# EAGLE board schematic (EAGLE 9.4.2)
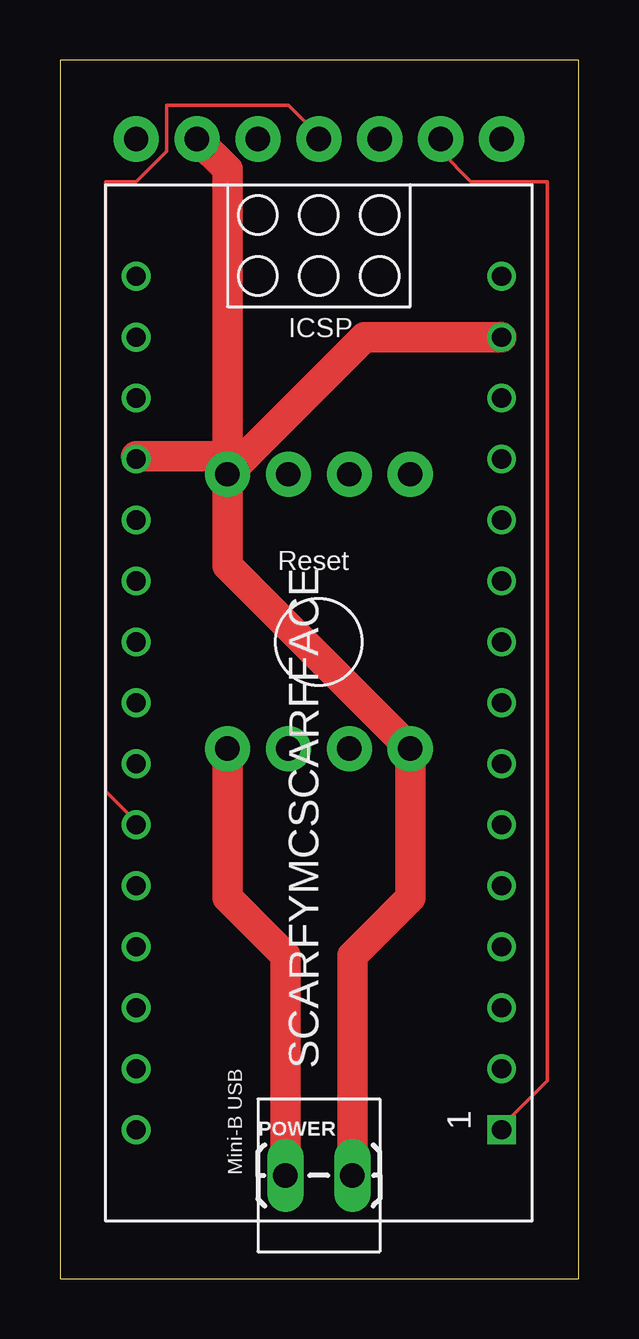
[diagram p0: board, top side]
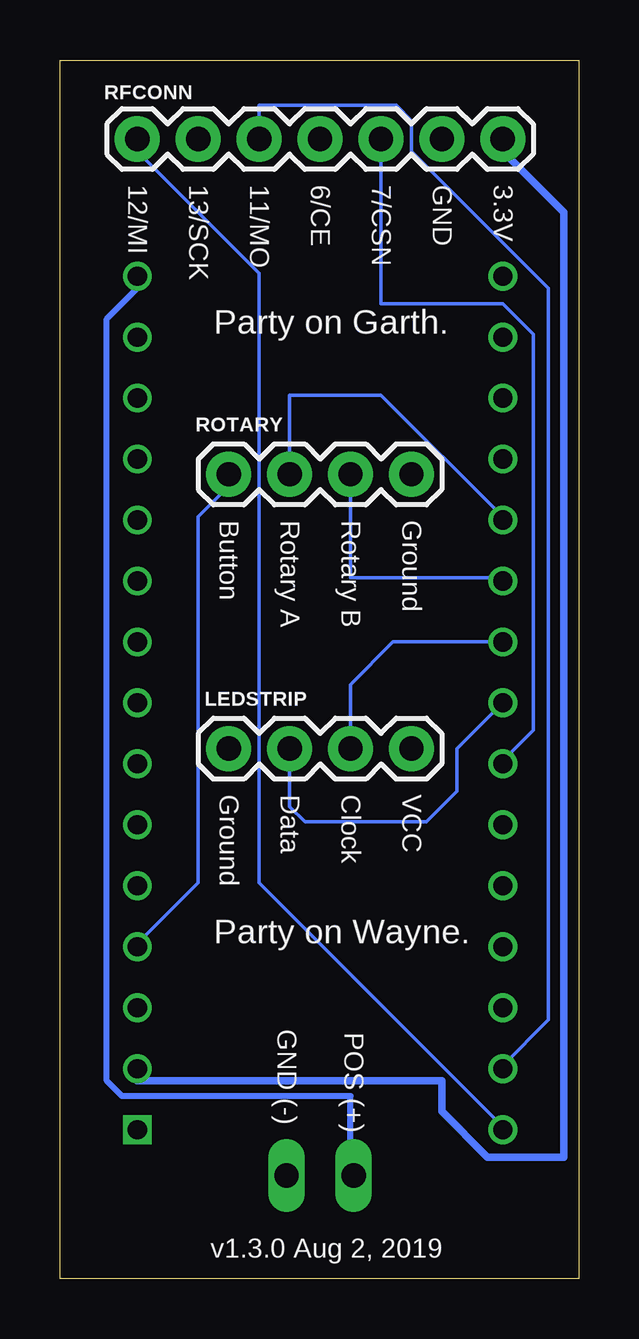
[diagram p1: board, bottom side, seen from below]

Size 21.64 x 50.79 mm. Coordinates in mm from the lower left corner, seen from the top.
Outline: 0,0 21.64,0 21.64,50.79 0,50.79 0,0
Copper layers (1*16): Top 0.035559375mm / dielectric 1.6mm / Bottom 0.035559375mm
Design rules "oshpark-2layer": minimum track width 6mil, minimum drill 10mil, track to track 6mil, track to pad 6mil, pad to pad 6mil, via to via 6mil, smd to smd 6mil, copper to edge 15mil, drill to drill 6mil, minimum pad ring 5mil, minimum via ring 5mil, stop-mask expansion 2.5mil, vias tented up to drill 0mil, thermal gap 10mil

## Footprints (pad centres in the part's own frame; a part is rotated, then mirrored left to right if it is on the bottom)
1X04 = drill 1.016 pad 1.88: 1 0,0; 2 2.54,0; 3 5.08,0; 4 7.62,0
1X02_LOCK_LONGPADS = drill 1.016 long: 1 -0.127,0; 2 2.667,0
1X07 = drill 1.016 pad 1.88: 1 0,0; 2 2.54,0; 3 5.08,0; 4 7.62,0; 5 10.16,0; 6 12.7,0; 7 15.24,0
ARDUINO_NANO = drill 0.8 square: 1 -20.32,-7.62 | drill 0.8: 2 -17.78,-7.62; 3 -15.24,-7.62; 4 -12.7,-7.62; 5 -10.16,-7.62; 6 -7.62,-7.62; 7 -5.08,-7.62; 8 -2.54,-7.62; 9 0,-7.62; 10 2.54,-7.62; 11 5.08,-7.62; 12 7.62,-7.62; 13 10.16,-7.62; 14 12.7,-7.62; 15 15.24,-7.62; 16 15.24,7.62; 17 12.7,7.62; 18 10.16,7.62; 19 7.62,7.62; 20 5.08,7.62; 21 2.54,7.62; 22 0,7.62; 23 -2.54,7.62; 24 -5.08,7.62; 25 -7.62,7.62; 26 -10.16,7.62; 27 -12.7,7.62; 28 -15.24,7.62; 29 -17.78,7.62; 30 -20.32,7.62

## Placement (x,y rotation side)
LEDSTRIP  [1X04]  14.61,22.1 0 bottom
POWER  [1X02_LOCK_LONGPADS]  9.53,4.32 0 top
RFCONN  [1X07]  18.41,47.5 0 bottom
ROTARY  [1X04]  14.61,33.53 0 bottom
SCARFYMCSCARFFACE  [ARDUINO_NANO]  10.79,26.54 90 top

## Library data of the parts
LEDSTRIP ROTARY = SparkFun-Connectors; PROD_ID: CONN-09696
POWER RFCONN = SparkFun-Connectors
SCARFYMCSCARFFACE = ArduinoNanoV30

## Nets
5V: SCARFYMCSCARFFACE.12
GND: LEDSTRIP.1 POWER.2 RFCONN.6 ROTARY.4 SCARFYMCSCARFFACE.14 SCARFYMCSCARFFACE.19
N$1: RFCONN.7 SCARFYMCSCARFFACE.2
N$2: RFCONN.5 SCARFYMCSCARFFACE.24
N$3: RFCONN.4 SCARFYMCSCARFFACE.25
N$4: RFCONN.2 SCARFYMCSCARFFACE.1
N$5: RFCONN.3 SCARFYMCSCARFFACE.29
N$7: RFCONN.1 SCARFYMCSCARFFACE.30
N$8: LEDSTRIP.2 SCARFYMCSCARFFACE.23
N$9: ROTARY.3 SCARFYMCSCARFFACE.21
N$10: ROTARY.2 SCARFYMCSCARFFACE.20
N$11: ROTARY.1 SCARFYMCSCARFFACE.4
N$12: LEDSTRIP.4 POWER.1 SCARFYMCSCARFFACE.15
N$13: LEDSTRIP.3 SCARFYMCSCARFFACE.22

## Tracks (layer width: path | path; a pad name or v marks a point on that pad's centre or on a via)
GND
  Top 0.152: 3.17,34.29 SCARFYMCSCARFFACE.19
  Top 1.27: POWER.2 12.19,13.46 14.61,15.88 LEDSTRIP.1 6.98,29.72 ROTARY.4 | ROTARY.4 12.7,39.24 SCARFYMCSCARFFACE.14 | RFCONN.6 6.98,46.23 6.98,34.29 | 6.98,34.29 ROTARY.4 | 6.98,34.29 3.17,34.29
N$1
  Bottom 0.305: SCARFYMCSCARFFACE.2 18.41,8.26 5.71,8.26 5.71,6.98 3.81,5.08 0.64,5.08 0.64,44.45 3.17,46.99 RFCONN.7
N$2
  Bottom 0.152: RFCONN.5 8.26,40.64 3.17,40.64 1.91,39.37 1.91,22.86 3.17,21.59 SCARFYMCSCARFFACE.24
N$3
  Top 0.152: SCARFYMCSCARFFACE.25 3.17,19.05 1.91,20.32 1.91,45.72 3.17,45.72 4.45,46.99 4.45,48.9 9.53,48.9 10.79,47.62 RFCONN.4
N$4
  Top 0.152: SCARFYMCSCARFFACE.1 18.41,6.35 20.32,8.26 20.32,45.72 17.14,45.72 15.88,46.99 RFCONN.2
N$5
  Bottom 0.152: RFCONN.3 13.33,48.9 7.62,48.9 6.98,48.26 6.98,46.99 1.27,41.28 1.27,10.79 3.17,8.89 SCARFYMCSCARFFACE.29
N$7
  Bottom 0.152: SCARFYMCSCARFFACE.30 3.17,6.35 13.33,16.51 13.33,41.91 18.41,46.99 RFCONN.1
N$8
  Bottom 0.152: LEDSTRIP.2 12.06,19.68 11.43,19.05 6.35,19.05 5.08,20.32 5.08,22.1 SCARFYMCSCARFFACE.23
N$9
  Bottom 0.152: ROTARY.3 9.53,29.21 3.17,29.21 SCARFYMCSCARFFACE.21
N$10
  Bottom 0.152: ROTARY.2 12.06,36.83 8.26,36.83 3.17,31.75 SCARFYMCSCARFFACE.20
N$11
  Bottom 0.152: SCARFYMCSCARFFACE.4 18.41,13.97 15.88,16.51 15.88,31.75 14.61,33.02 ROTARY.1
N$12
  Top 1.27: POWER.1 9.4,13.46 6.98,15.88 LEDSTRIP.4
  Bottom 0.254: SCARFYMCSCARFFACE.15 18.41,41.28 19.68,40.01 19.68,8.26 19.05,7.62 9.53,7.62 9.53,4.45 POWER.1
N$13
  Bottom 0.152: LEDSTRIP.3 9.53,24.77 7.75,26.54 SCARFYMCSCARFFACE.22

## Text on the board
bPlace: 3.3V | GND | 7/CSN | 6/CE | 11/MO | 13/SCK | 12/MI | Party on Garth. | Ground | Rotary B | Rotary A | Button | VCC | Clock | Data | Ground | Party on Wayne. | POS (+) | GND (-) | v1.3.0 Aug 2, 2019